# Altium PCB TDA2030enbaştan.PcbDoc
Units mm, origin at the board's own origin, x right, y up, seen from the top; angles counter-clockwise.
Board outline 96.22 x 100 mm, 2 copper layers (Top Layer, Bottom Layer); 35 components, 21 nets, 82 pads, 3 vias.
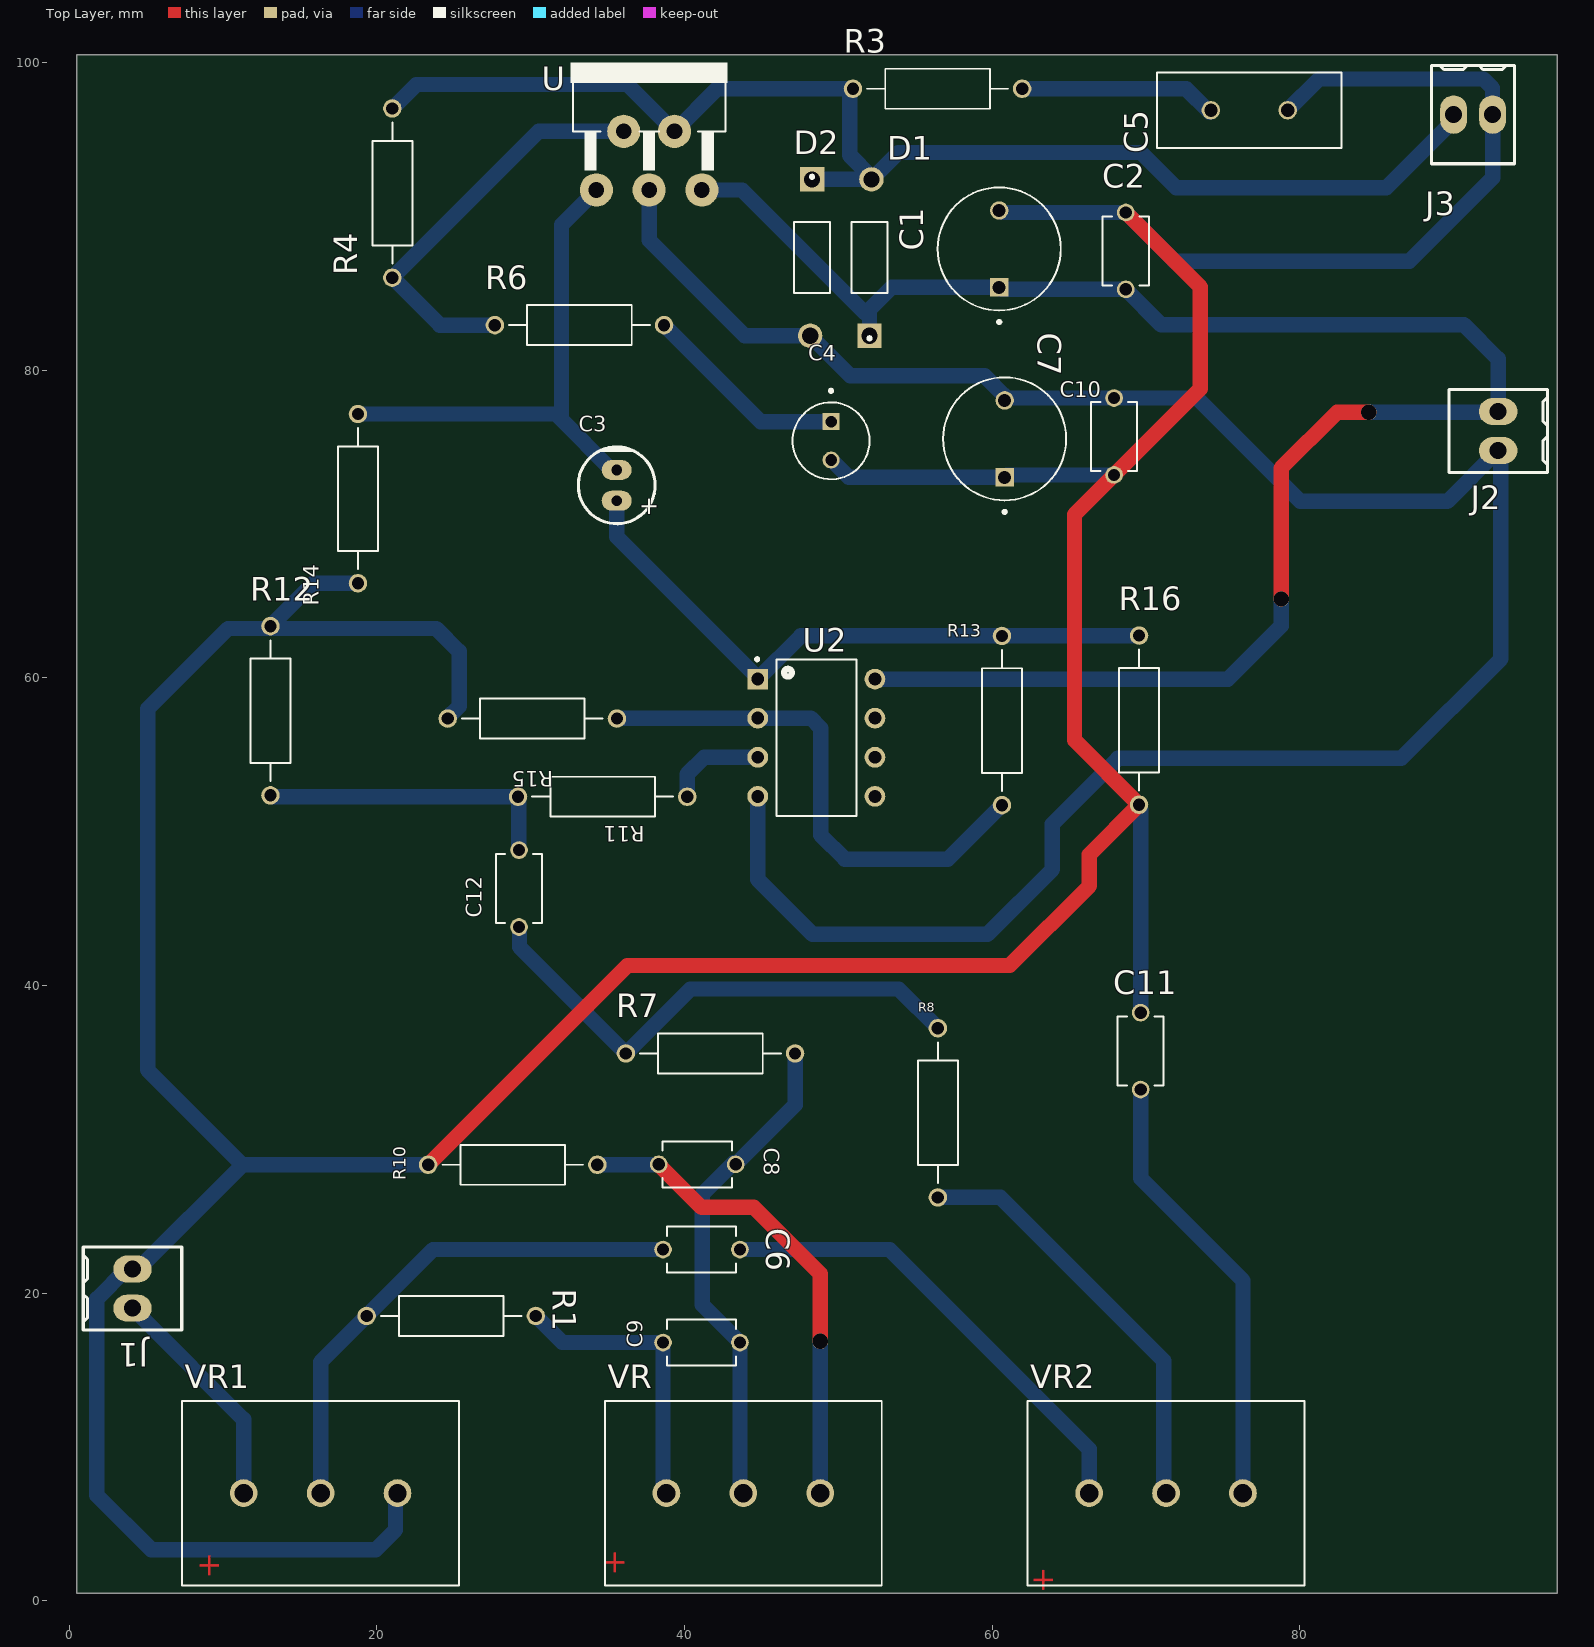
[diagram p0: Top Layer view]
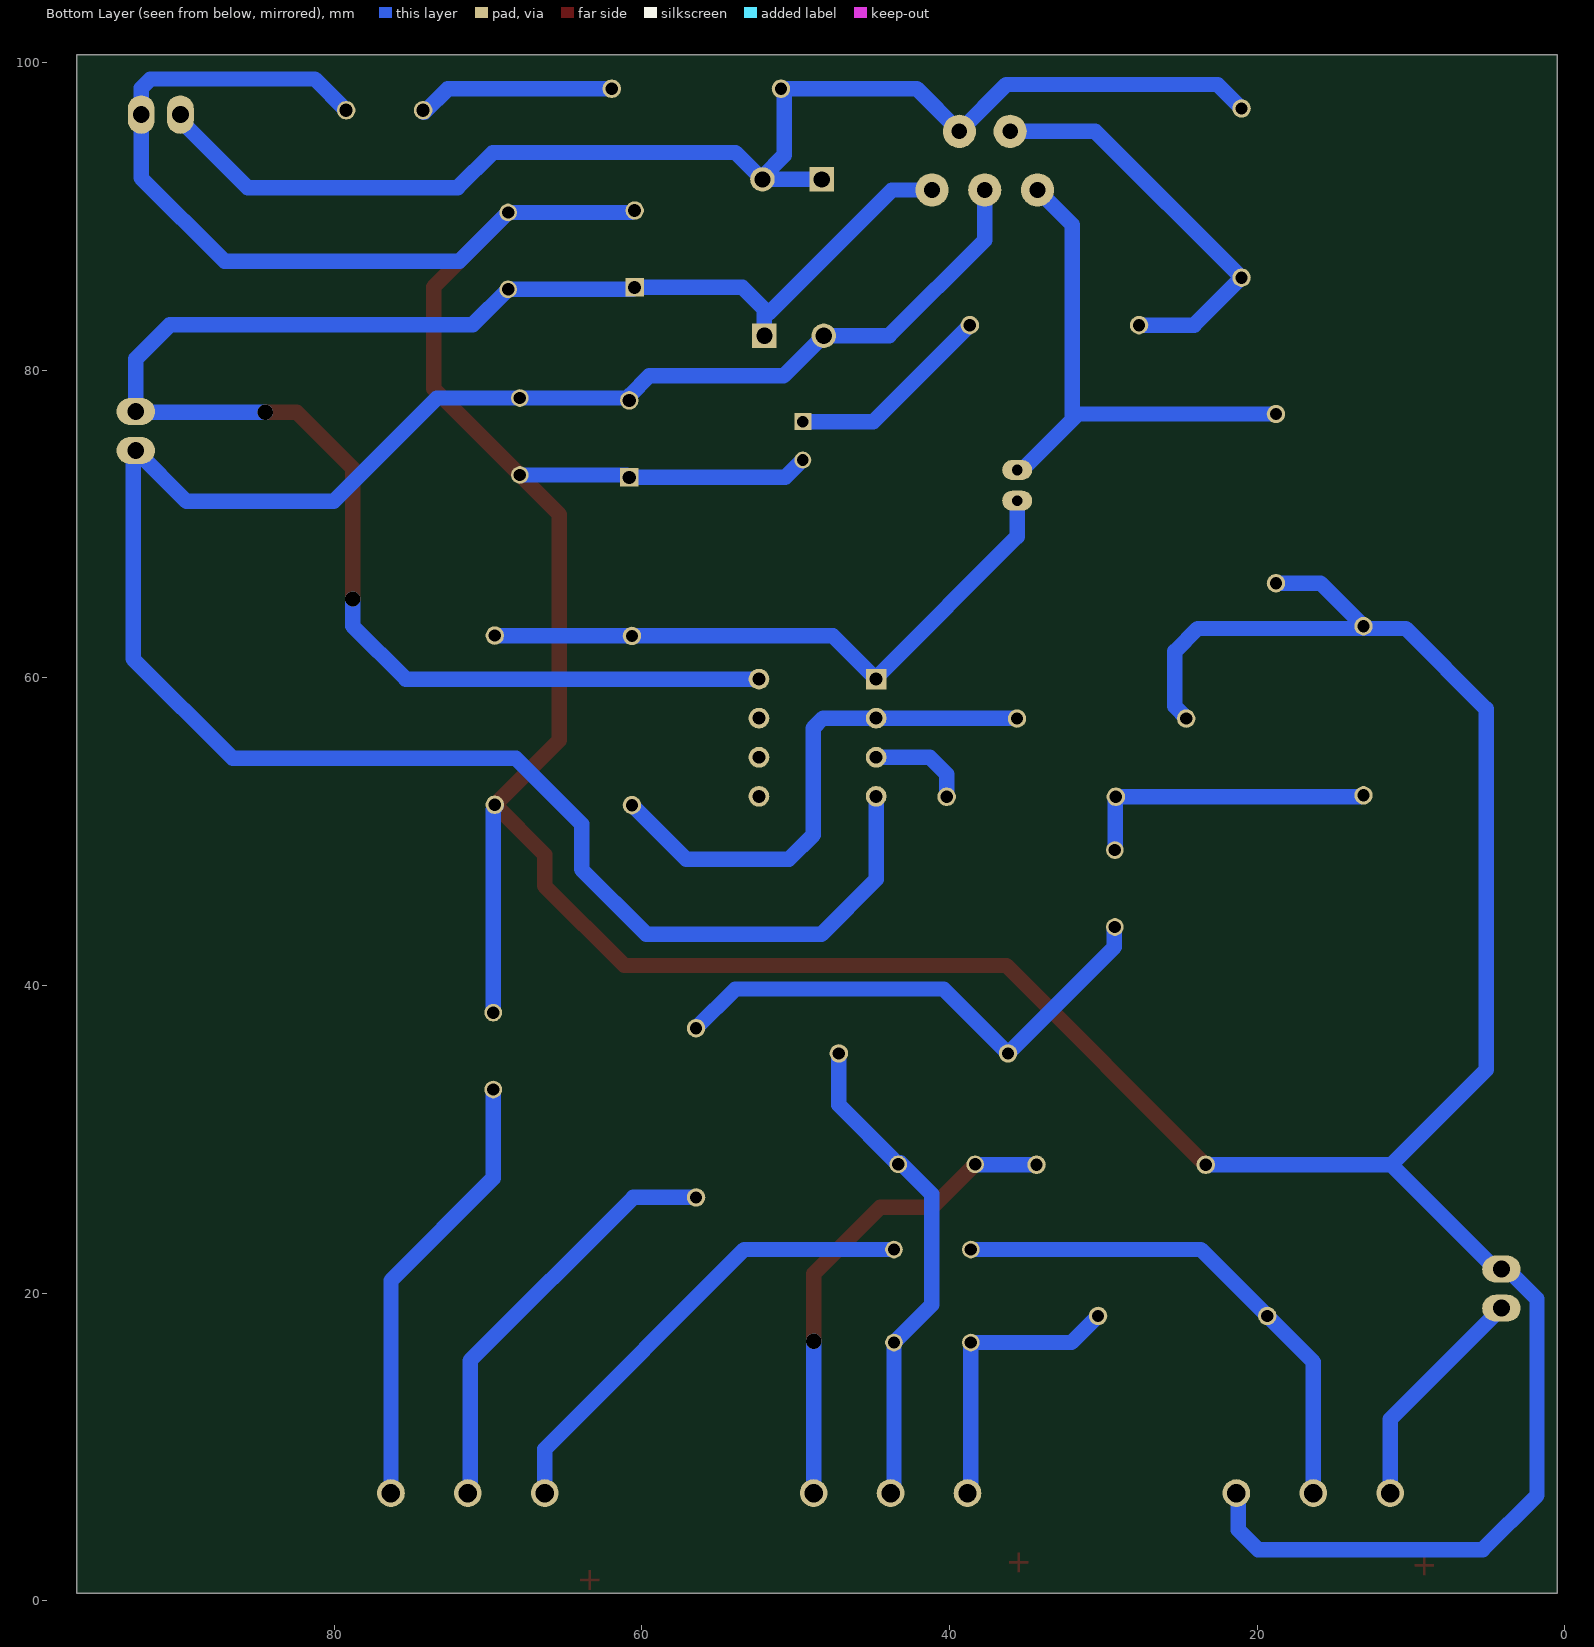
[diagram p1: Bottom Layer view, seen from below]
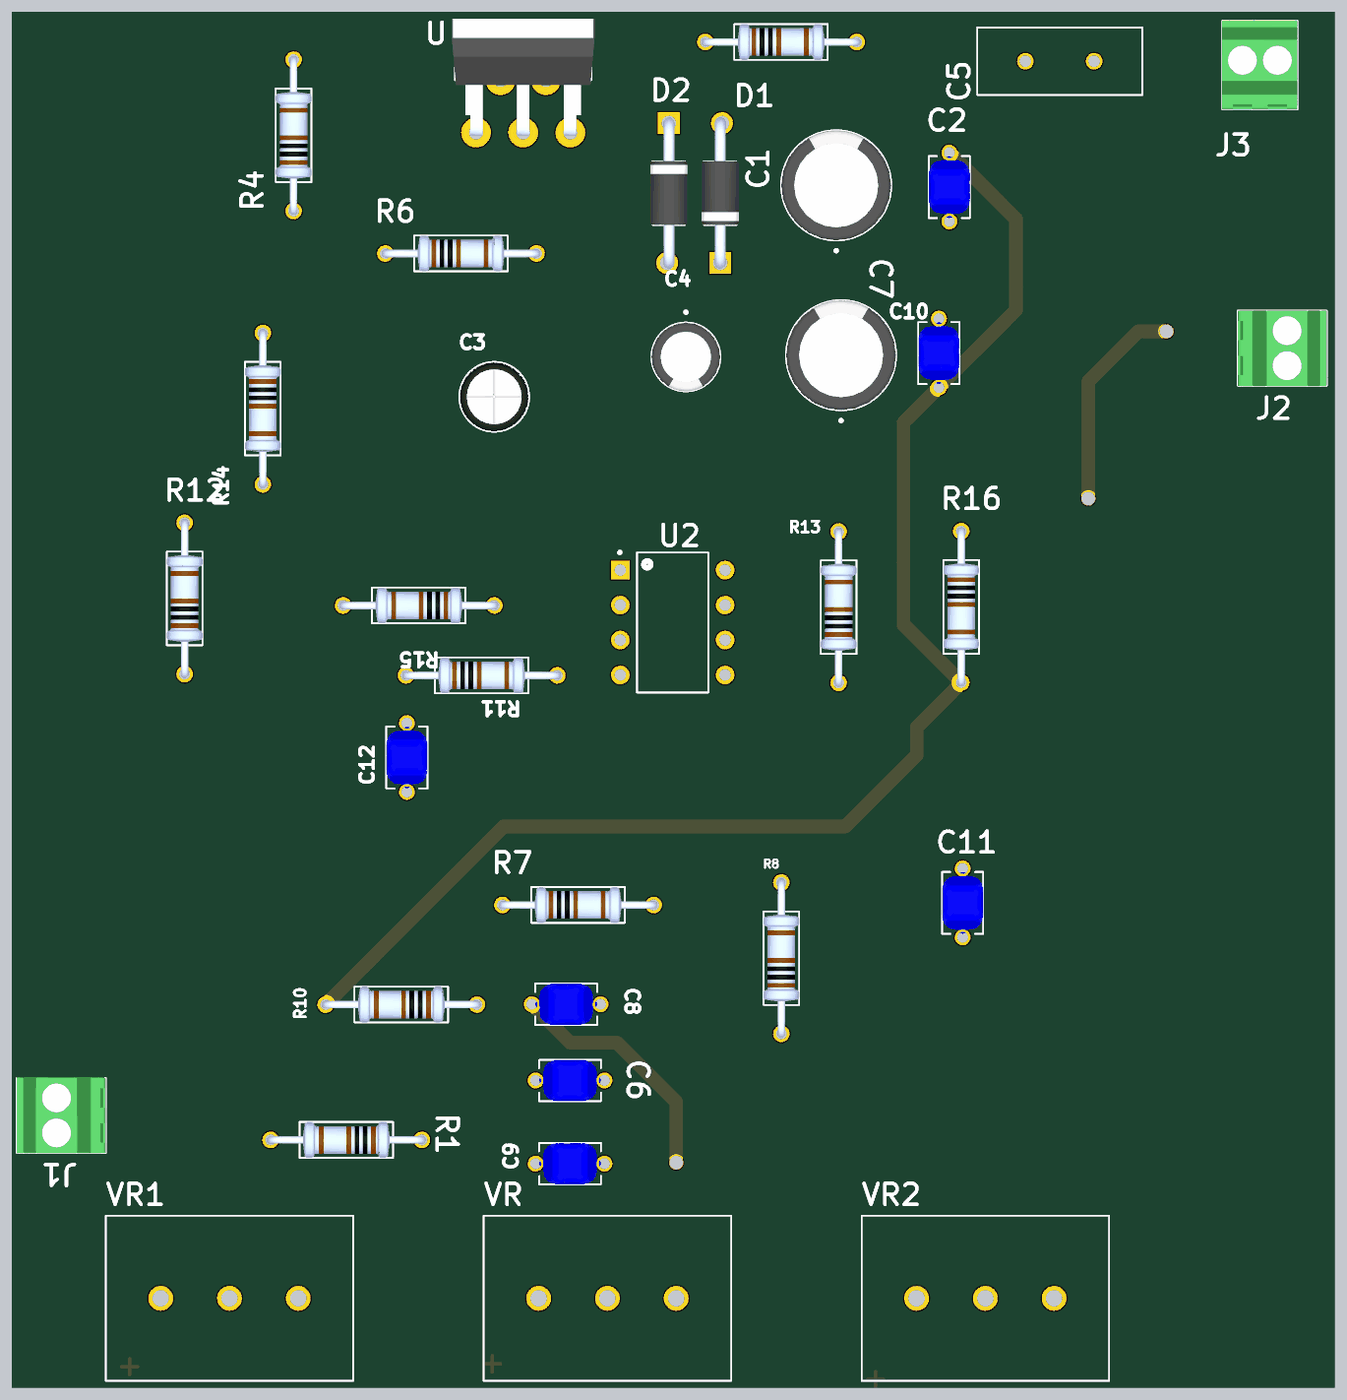
[diagram p2: 3D render of the assembled board from above, using the file's embedded part models]

## Layer stack, top to bottom
Top Solder: solder mask 0.0102, Solder Resist, Dk 3.5
Top Layer: signal copper 0.0356
Dielectric 1: dielectric 0.32, FR-4, Dk 4.8
Bottom Layer: signal copper 0.0356
Bottom Solder: solder mask 0.0102, Solder Resist, Dk 3.5

## Board outline
0.5,0.5 0.5,100.5 96.723,100.5 96.723,0.5

## Design rules (kind name [scope] priority, off if disabled: settings)
Clearance [All] p1: gap=0.254 ignorepadtopadclearanceinfootprint=FALSE except(0: Arc-Hole Track-Hole SMDPad-Hole THPad-Hole Via-Hole Fill-Hole Poly-Hole Region-Hole Text-Hole)
PolygonConnect [All] p1: connectstyle=Relief reliefconductorwidth=0.254 reliefentries=4 polygonreliefangle="90 Angle" airgapwidth=0.254
RoutingVias [All] p1: holewidth=0.4 width=0.5 viastyle="Through Hole" minholewidth=0.3 minwidth=0.5 maxholewidth=1 maxwidth=1
SolderMaskExpansion [All] p1: expansion=0.102 istentingtop=FALSE
Width [All] p1: maxlimit=1.5 minlimit=0.254 preferedwidth=1 minimp=50.000000 maximp=50.000000 favimp=50.000000
30 further rules are at their usual default settings.

## Classes and differential pairs
component class TDA2030: C1 C2 C3 C4 C5 C6 C7 C8 C9 C10 C11 C12 D1 D2 J1 J3 R1 R3 R4 R6 R7 R10 R11 R12 R13 R14 R15 R16 U2 VR VR1 VR2

## Components (designator, comment, footprint, x,y, rotation, side; value= is the part's Value field where it differs from the comment)
C1 "EEUFC1V101B" CAPPRD500W60D800H1150 60.46,87.884 r90 top value="100 uF"
C2 "" CAPRB500W50L450T300H550 68.69,87.757 r270 top value=100nF
C3 "1µF" "CAP TH ALUM ELEC D5.00mm S2.00mm H11.00mm" 35.593,72.517 r270 top
C4 "ECA1HM220I" CAPPRD250W50D500H1100 49.53,75.413 r270 top value="22 uF"
C5 "ECQE6682KF3" CAPRR500W60L1200T490H1500 76.716,96.901 r180 top value="0.22 µF"
C6 "" CAPRB500W50L450T300H550 41.105,22.835 r180 top value=2.2nF
C7 "EEUFC1V101B" CAPPRD500W60D800H1150 60.816,75.54 r90 top value="100 uF"
C8 "" CAPRB500W50L450T300H550 40.826,28.372 r0 top value=100nF
C9 "" CAPRB500W50L450T300H550 41.105,16.789 r180 top value=22nF
C10 "" CAPRB500W50L450T300H550 67.928,75.692 r90 top value=100nF
C11 "" CAPRB500W50L450T300H550 69.655,35.738 r270 top value=22nF
C12 "" CAPRB500W50L450T300H550 29.243,46.304 r90 top value=100nF
D1 "1N4007-T" DIOAD780W78L463D236 52.028,87.325 r90 top
D2 "1N4007-T" DIOAD780W78L463D236 48.294,87.325 r270 top
J1 "282834-2" "TE 282834-2" 4.115,20.295 r90 top
J2 "282834-2" "TE 282834-2" 92.896,76.048 r270 top
J3 "282834-2" "TE 282834-2" 91.27,96.622 r0 top
R1 "4.7K" RESAD1100W55L680D260 24.836,18.517 r180 top
R3 "1R1W" RESAD1100W55L680D260 56.452,98.298 r0 top value=2.2K
R4 "20K" RESAD1100W55L680D260 21.006,91.516 r90 top value=2.2K
R6 "680" RESAD1100W55L680D260 33.172,82.931 r0 top value=2.2K
R7 "1K" RESAD1100W55L680D260 41.689,35.585 r0 top
R8 "2k2K" RESAD1100W55L680D260 56.472,31.725 r90 top value=2.2K
R10 "1K" RESAD1100W55L680D260 28.837,28.346 r180 top
R11 "1K" RESAD1100W55L680D260 34.679,52.273 r0 top value=100K
R12 "100K" RESAD1100W55L680D260 13.081,57.861 r90 top
R13 "1K" RESAD1100W55L680D260 60.638,57.226 r90 top value=2.2K
R14 "22K" RESAD1100W55L680D260 18.771,71.653 r270 top value=2.2K
R15 "1K" RESAD1100W55L680D260 30.107,57.353 r180 top value=2.2K
R16 "1M" RESAD1100W55L680D260 69.553,57.252 r270 top value=2.2K
U "TDA2030V" CB360 37.702,99.974 r0 top
U2 "JRC4558D" DIP762W46P254L880H425Q8 48.573,56.109 r0 top
VR "P160KN-0QC15B500K" P160 43.825,7.003 r180 top
VR1 "P160KN-0QC15B500K" P160 16.344,7.003 r180 top
VR2 "P160KN-0QC15B500K" P160 71.306,7.003 r0 top

## Footprints (in the part's own frame and the unit in brackets; to place one, negate y for a bottom-side part, rotate by r counter-clockwise, add the part's x,y. Pads: shape width x height; smd on the part's side, far side on the other; paste and mask are expansions set on the pad)
"CAP TH ALUM ELEC D5.00mm S2.00mm H11.00mm" [mm] "5mm Diameter 2mm Lead Spacing Aluminum Electrolytic Capacitors Radial, Can"
  oval 1.3x1.95 hole 0.7: 1(1,0) 2(-1,0)
  silkscreen extent -2.5,-2.5 2.5,2.5, body extent -2.51,-2.5 2.5,2.5, height 11
CAPPRD250W50D500H1100 [mm]
  round 1.1 hole 0.75: N(1.25,0)
  rect 1.1x1.1 / inner round 1.1 / far side rect 1.1x1.1 hole 0.75: P(-1.25,0)
  silkscreen extent -3.35,-2.5 2.5,2.5, body extent -2.5,-2.5 2.5,2.5, height 11
CAPPRD500W60D800H1150 [mm]
  round 1.2 hole 0.85: N(2.5,0)
  rect 1.2x1.2 hole 0.85: P(-2.5,0)
  silkscreen extent -4.85,-4 4,4, body extent -4,-4 4,4, height 11.5
CAPRB500W50L450T300H550 [mm]
  round 1.15 hole 0.8: 1(-2.5,0) 2(2.5,0)
  silkscreen extent -2.25,-1.5 2.25,1.5, body extent -2.24,-1.5 2.24,1.5, height 2.75
CAPRR500W60L1200T490H1500 [mm]
  round 1.2 hole 0.85: 1(-2.5,0) 2(2.5,0)
  silkscreen extent -6,-2.45 6,2.45
CB360 [mil]
  round 85 hole 40: 1(-135,-325) 2(-65,-175) 3(0,-325) 4(65,-175) 5(135,-325)
  silkscreen extent -200,-275 200,0, body extent -205,-335 205,0, height 872
DIOAD780W78L463D236 [mm]
  round 1.59 hole 1.06: A(5.08,-0.127)
  rect 1.59x1.59 / inner round 1.59 / far side rect 1.59x1.59 hole 1.06: K(-5.08,0)
  silkscreen extent -5.35,-1.18 2.32,1.18, body extent -5.47,-1.35 5.47,1.35, height 2.69
DIP762W46P254L880H425Q8 [mm]
  rect 1.348x1.348 hole 0.84: 1(-3.81,3.81)
  round 1.348 hole 0.84: 2(-3.81,1.27) 3(-3.81,-1.27) 4(-3.81,-3.81) 5(3.81,-3.81) 6(3.81,-1.27) 7(3.81,1.27) 8(3.81,3.81)
  silkscreen extent -3.95,-5.08 2.6,5.2
P160 [mm]
  round 1.8 hole 1.2: 1(-5,0) 2(0,0) 3(5,0)
  silkscreen extent -9,-6 9,6
RESAD1100W55L680D260 [mm]
  round 1.2 hole 0.8: 1(-5.5,0) 2(5.5,0)
  silkscreen extent -4.58,-1.3 4.58,1.3, body extent -5.77,-1.3 5.77,1.3, height 2.6
"TE 282834-2" [mm]
  oval 1.75x2.5 hole 1.1: 1(-1.27,0) 2(1.27,0)
  silkscreen extent -2.7,-3.2 2.7,3.2, body extent -2.77,-3.25 2.77,3.25, height 10

## Part data
C1 C7: "100F 35V Aluminum Electrolytic Capacitors Radial, Can 2000 Hrs @ 105C", Package="RADIAL-2 Panasonic", Availability="Not in stock", Check_prices=https://www.snapeda.com/parts/EEUFC1V101B/Panasonic/view-part/?ref=eda, MF=Panasonic, MP=EEUFC1V101B, price=None, SnapEDA_Link=https://www.snapeda.com/parts/EEUFC1V101B/Panasonic/view-part/?ref=snap
C2 C6 C8 C9 C10 C11 C12: library part FG24X7R1H105KRT06, "Cap Ceramic 1uF 50V X7R 10% Radial 5mm 125Â°C Tape", Package="Radial TDK", Availability="In Stock", Check_prices=https://www.snapeda.com/parts/FG24X7R1H105KRT06/TDK/view-part/?ref=eda, MF=TDK, MP=FG24X7R1H105KRT06, price=None, Purchase-URL=https://pricing.snapeda.com/search/part/FG24X7R1H105KRT06/?ref=eda, SnapEDA_Link=https://www.snapeda.com/parts/FG24X7R1H105KRT06/TDK/view-part/?ref=snap
C3: library part RFS-50V010ME3#5, "CAP ALUM 1UF 20% 50V RADIAL", Device Package="Radial, Can", Lifetime @ Temp.="1000 Hrs @ 85°C", manufacturer="Elna America", Operating Temperature="-40°C ~ 85°C", Ripple Current @ Low Frequency="14mA @ 120Hz", Supplier Part Number 1=604-1117-ND, Tolerance=±20%, Voltage - Rated=50V, Applications=Audio, Capacitance=1µF, componentlink1description=Datasheet, componentlink1url=http://www.elna.co.jp/en/capacitor/alumi/catalog/pdf/rfs_e.pdf, componentlink2description="DigiKey Link", componentlink2url=http://digikey.com/product-detail/en/elna-america/RFS-50V010ME3-5/604-1117-ND/2171168, Height - Seated (Max)="0.433\" (11.00mm)", lastupdated="9/4/2020 11:28:56 PM", Lead Spacing="0.079\" (2.00mm)", Lifecycle Status=Active, Minimum Order=1, Mounting Type="Through Hole", Package / Case="Radial, Can", packaging=Bulk, Part Number=RFS-50V010ME3#5, Part Status=Active, partid=21459, Polarization=Polar, price=0.30, series="RFS, SILMIC II", Size / Dimension="0.197\" Dia (5.00mm)", Supplier 1=DigiKey
C4: "Capacitor,Alum Lytic,Cap 22 uF,Tol 20%,Vol-Rtg 50 VDC,Radial,5x11,Tape&Box", Package="RADIAL-2 Panasonic", Check_prices=https://www.snapeda.com/parts/ECA-1HM220I/Panasonic/view-part/?ref=eda, MF=Panasonic, MP=ECA-1HM220I, SnapEDA_Link=https://www.snapeda.com/parts/ECA-1HM220I/Panasonic/view-part/?ref=snap
C5: Package=None, Availability=Unavailable, MP=ECQE6682KF3, price=None
D1 D2: "Diode Standard 1A 1000V 1Vf DO41", Package="DO-41 Diodes Inc.", Check_prices=https://www.snapeda.com/parts/1N4007-T/Diodes+Inc./view-part/?ref=eda, MF="Diodes Incorporated", MP=1N4007-T, SnapEDA_Link=https://www.snapeda.com/parts/1N4007-T/Diodes+Inc./view-part/?ref=snap
J1 J2 J3: "TERM BLK 2P SIDE ENT 2.54MM PCB", Color=Green, Current=10A, manufacturer="TE Connectivity AMP Connectors", Supplier Part Number 1=A98333-ND, Voltage=150V, componentlink1description=Datasheet, componentlink1url=https://www.te.com/commerce/DocumentDelivery/DDEController?Action=srchrtrv&DocNm=282834&DocType=Customer+Drawing&DocLang=English, componentlink2description="DigiKey Link", componentlink2url=http://digikey.com/product-detail/en/te-connectivity-amp-connectors/282834-2/A98333-ND/1150135, lastupdated="1/15/2020 4:15:38 AM", Lifecycle Status=Active, Mating Orientation="Horizontal with Board", Minimum Order=1, Mounting Type="Through Hole", Number of Levels=1, packaging=Bulk, Part Number=282834-2, Part Status=Active, Pitch="0.100\" (2.54mm)", Positions Per Level=2, price=0.88, series=Buchanan, Supplier 1=DigiKey, Wire Gauge="16-30 AWG", Wire Termination="Screw - Rising Cage Clamp"
R1 R3 R4 R6 R7 R8 R10 R11 R12 R13 R14 R15 R16: library part MFR-25FBF52-1K, "1.07 kOhms Â±1% 0.25W, 1/4W Through Hole Resistor Axial - Metal Film", Package="Axial Yageo", Availability="In Stock", Check_prices=https://www.snapeda.com/parts/MFR-25FBF52-1K/Yageo/view-part/?ref=eda, MF=Yageo, MP=MFR-25FBF52-1K, price=None, Purchase-URL=https://pricing.snapeda.com/search/part/MFR-25FBF52-1K/?ref=eda, SnapEDA_Link=https://www.snapeda.com/parts/MFR-25FBF52-1K/Yageo/view-part/?ref=snap
U: "Amplifier IC 1-Channel _Mono_ Class AB 5-PENTAWATT", Package="Pentawatt-5 STMicroelectronics", Availability=Unavailable, MF=STMicroelectronics, MP=TDA2030V, price=None, SnapEDA_Link=https://www.snapeda.com/parts/TDA2030V/STMicroelectronics/view-part/814468/?ref=snap
U2: "Dip8", Package="DIP-8 New Japan Radio", Availability=Unavailable, MF="New Japan Radio", MP=JRC4558D, price=None, SnapEDA_Link=https://www.snapeda.com/parts/JRC4558D/New%20Japan%20Radio/view-part/424120/?ref=snap
VR VR1 VR2: "500k Ohm 1 Gang Linear Panel Mount Potentiometer None 1 Turn Conductive Plastic 0.2W, 1/5W PC Pins", Package=None, Digi-Key_Part_Number=987-1304-ND, Digi-Key_Purchase_URL=https://www.digikey.cz/product-detail/en/tt-electronics-bi/P160KN-0QC15B500K/987-1304-ND/2408881?utm_source=snapeda&utm_medium=aggregator&utm_campaign=symbol, MF="TT Electronics/BI", MP=P160KN-0QC15B500K, SnapEDA_Link=https://www.snapeda.com/parts/P160KN-0QC15B500K/TT%20Electronics/BI/view-part/903272/?ref=snap

## Via types
v1: diameter 1, hole 1, Top Layer to Bottom Layer, 3 vias

## Nets (pads, with @x,y where several pads share a name; then routed paths per layer and width w, separated by ;. In a path a pad name is that pad's centre, name@x,y a point inside that pad or via, vN(x,y) a via of type N, cw(c..) or ccw(c..) an arc to the next point about the centre after c; other vN are vias at no path point)
+12: C1.P C2.2 D1.K J2.1 U2.8 U.5 | length 116.2
  Top Layer w1: v1(78.791,65.126) 78.791,73.635 82.423,77.267 v1(84.48,77.267)
  Bottom Layer w1: U.5 43.747,91.719 51.769,83.698 ; D1.K 52.028,83.957 53.455,85.384 C1.P 60.587,85.257 C2.2 70.99,82.956 90.678,82.956 92.896,80.739 J2.1 92.845,77.267 v1(84.48,77.267) ; U2.8 75.336,59.919 78.791,63.373 v1(78.791,65.126)
-12: C7.N C10.2 D2.A J2.2 U2.4 U.3 | length 145
  Bottom Layer w1: U.3 37.702,88.46 43.917,82.245 D2.A 50.783,79.629 59.52,79.629 60.777,78.372 60.777,78.078 C7.N ; U2.4 44.763,46.888 48.319,43.332 59.698,43.332 63.914,47.549 63.914,50.503 68.174,54.762 86.589,54.762 93.068,61.242 93.068,74.606 J2.2 89.594,71.476 80.035,71.476 73.319,78.192 C10.2 61.022,78.192 C7.N@60.87,78.04
GND: C1.N C2.1 C4.N C5.1 C7.P C10.1 C11.1 J1.2 J3.2 R10.2 R12.2 R14.2 R15.2 R16.2 VR1.1 | length 319.5
  Top Layer w1: R10.2 36.291,41.3 61.138,41.3 66.319,46.482 66.319,48.518 R16.2 65.354,55.951 65.354,70.619 C10.1 73.533,78.797 73.533,85.414 C2.1
  Bottom Layer w1: 11.272,28.346 4.49,21.565 J1.2 3.74,21.565 1.803,19.628 1.803,6.858 5.334,3.327 19.939,3.327 21.215,4.603 21.215,6.874 VR1.1 ; R12.2@12.874,63.209 10.326,63.209 5.105,57.988 5.105,34.519 11.278,28.346 R10.2 ; R12.2@13.081,63.209 23.862,63.209 25.346,61.724 25.347,58.148 24.607,57.407 R15.2 ; R12.2 15.873,66.153 R14.2 ; C4.N 49.557,74.163 50.68,73.04 C7.P 60.968,73.192 C10.1 ; C1.N 60.514,90.384 60.641,90.257 C2.1 71.85,87.097 87.13,87.097 92.54,92.507 J3.2 92.532,96.63 92.532,98.347 91.946,98.933 81.248,98.933 C5.1 ; R16.2@69.461,51.726 69.524,51.726 69.591,51.659 69.591,51.481 69.655,51.418 C11.1
NetC3_1: C3.1 R13.2 R16.1 U2.1 | length 41.2
  Bottom Layer w1: C3.1 35.593,69.175 44.589,60.18 44.589,60.093 U2.1 47.57,62.726 R13.2 R16.1@69.401,62.726
NetC3_2: C3.2 R14.1 U.1 | length 34.2
  Bottom Layer w1: R14.1 31.632,77.153 32.004,76.781 ; U.1 32.004,89.451 32.004,77.153 32.004,76.781 ; C3.2 35.495,73.615 35.17,73.615 32.004,76.781
NetC4_P: C4.P R6.2 | length 13.5
  Bottom Layer w1: R6.2 44.941,76.663 C4.P
NetC5_2: C5.2 R3.2 | length 13
  Bottom Layer w1: R3.2@61.867,98.298 72.612,98.298 74.136,96.774 C5.2@74.191,96.774
NetC6_1: C6.1 VR2.1 | length 30.9
  Bottom Layer w1: C6.1 53.34,22.835 66.306,9.869 VR2.1
NetC6_2: C6.2 R1.2 VR1.2 | length 33.8
  Bottom Layer w1: VR1.2 16.344,15.525 R1.2 23.654,22.835 C6.2
NetC8_1: C8.1 R10.1 VR.1 | length 31.7
  Top Layer w1: C8.1 41.12,25.578 44.509,25.578 48.827,21.26 v1(48.827,16.866)
  Bottom Layer w1: R10.1 38.3,28.346 C8.1 ; VR.1 48.825,16.864 v1(48.827,16.866)
NetC8_2: C8.2 C9.1 R7.2 VR.2 | length 32.3
  Bottom Layer w1: C8.2@43.204,28.493 41.156,26.445 41.156,19.239 C9.1 43.605,7.439 43.825,7.22 VR.2 ; C8.2 47.189,32.235 R7.2
NetC9_2: C9.2 R1.1 VR.3 | length 18.9
  Bottom Layer w1: R1.1 32.063,16.789 C9.2 38.605,7.439 38.825,7.22 VR.3
NetC11_2: C11.2 VR2.3 | length 29
  Bottom Layer w1: C11.2 69.655,27.475 76.306,20.824 VR2.3
NetC12_1: C12.1 R7.1 R8.2 | length 34.2
  Bottom Layer w1: C12.1 29.272,43.776 29.272,42.503 R7.1 40.38,39.776 53.92,39.776 R8.2
NetC12_2: C12.2 R11.1 R12.1 | length 19.6
  Bottom Layer w1: R12.1@13.146,52.296 13.173,52.323 13.261,52.323 13.31,52.273 R11.1 29.215,52.238 29.215,48.833 C12.2
NetD1_A: D1.A D2.K J3.1 R3.1 R4.2 U.4 | length 85.2
  Bottom Layer w1: R4.2 22.567,98.577 36.305,98.577 U.4 42.121,98.298 R3.1@50.86,98.298 ; D2.K@48.119,92.657 D2.K@48.294,92.481 ; D2.K D1.A ; R3.1@50.744,98.298 50.744,93.976 52.155,92.565 D1.A ; J3.1 90,96.247 85.625,91.872 71.966,91.872 69.68,94.158 53.907,94.158 D1.A
NetJ1_1: J1.1 VR1.3 | length 15.1
  Bottom Layer w1: J1.1 4.287,19.025 4.633,18.678 4.633,18.506 11.344,11.795 VR1.3
NetR4_1: R4.1 R6.1 U.2 | length 26.9
  Bottom Layer w1: R6.1 24.091,82.931 R4.1 30.519,95.529 U.2
NetR8_1: R8.1 VR2.2 | length 27.7
  Bottom Layer w1: R8.1 60.542,26.225 71.153,15.614 71.153,7.156 VR2.2
NetR11_2: R11.2 U2.3 | length 6.5
  Bottom Layer w1: R11.2 40.179,53.743 41.275,54.839 U2.3
NetR13_1: R13.1 R15.1 U2.2 | length 34.4
  Bottom Layer w1: R15.1 35.62,57.366 44.75,57.366 U2.2 48.209,57.379 48.852,56.736 48.852,49.784 50.427,48.209 57.121,48.209 R13.1
pads on no net: U2.5 U2.6 U2.7

## Other copper
Top Layer:
  text "+" at 34.857,3.352 h1.52 r270
  text "+" at 8.492,3.149 h1.52 r270
  text "+" at 62.721,2.209 h1.52 r270

## Text inside footprints (layer, text, board x,y; h text height)
C3: Top Overlay "+" at 36.843,71.817 h2 r270